# EAGLE board revised (EAGLE 8.2.1)
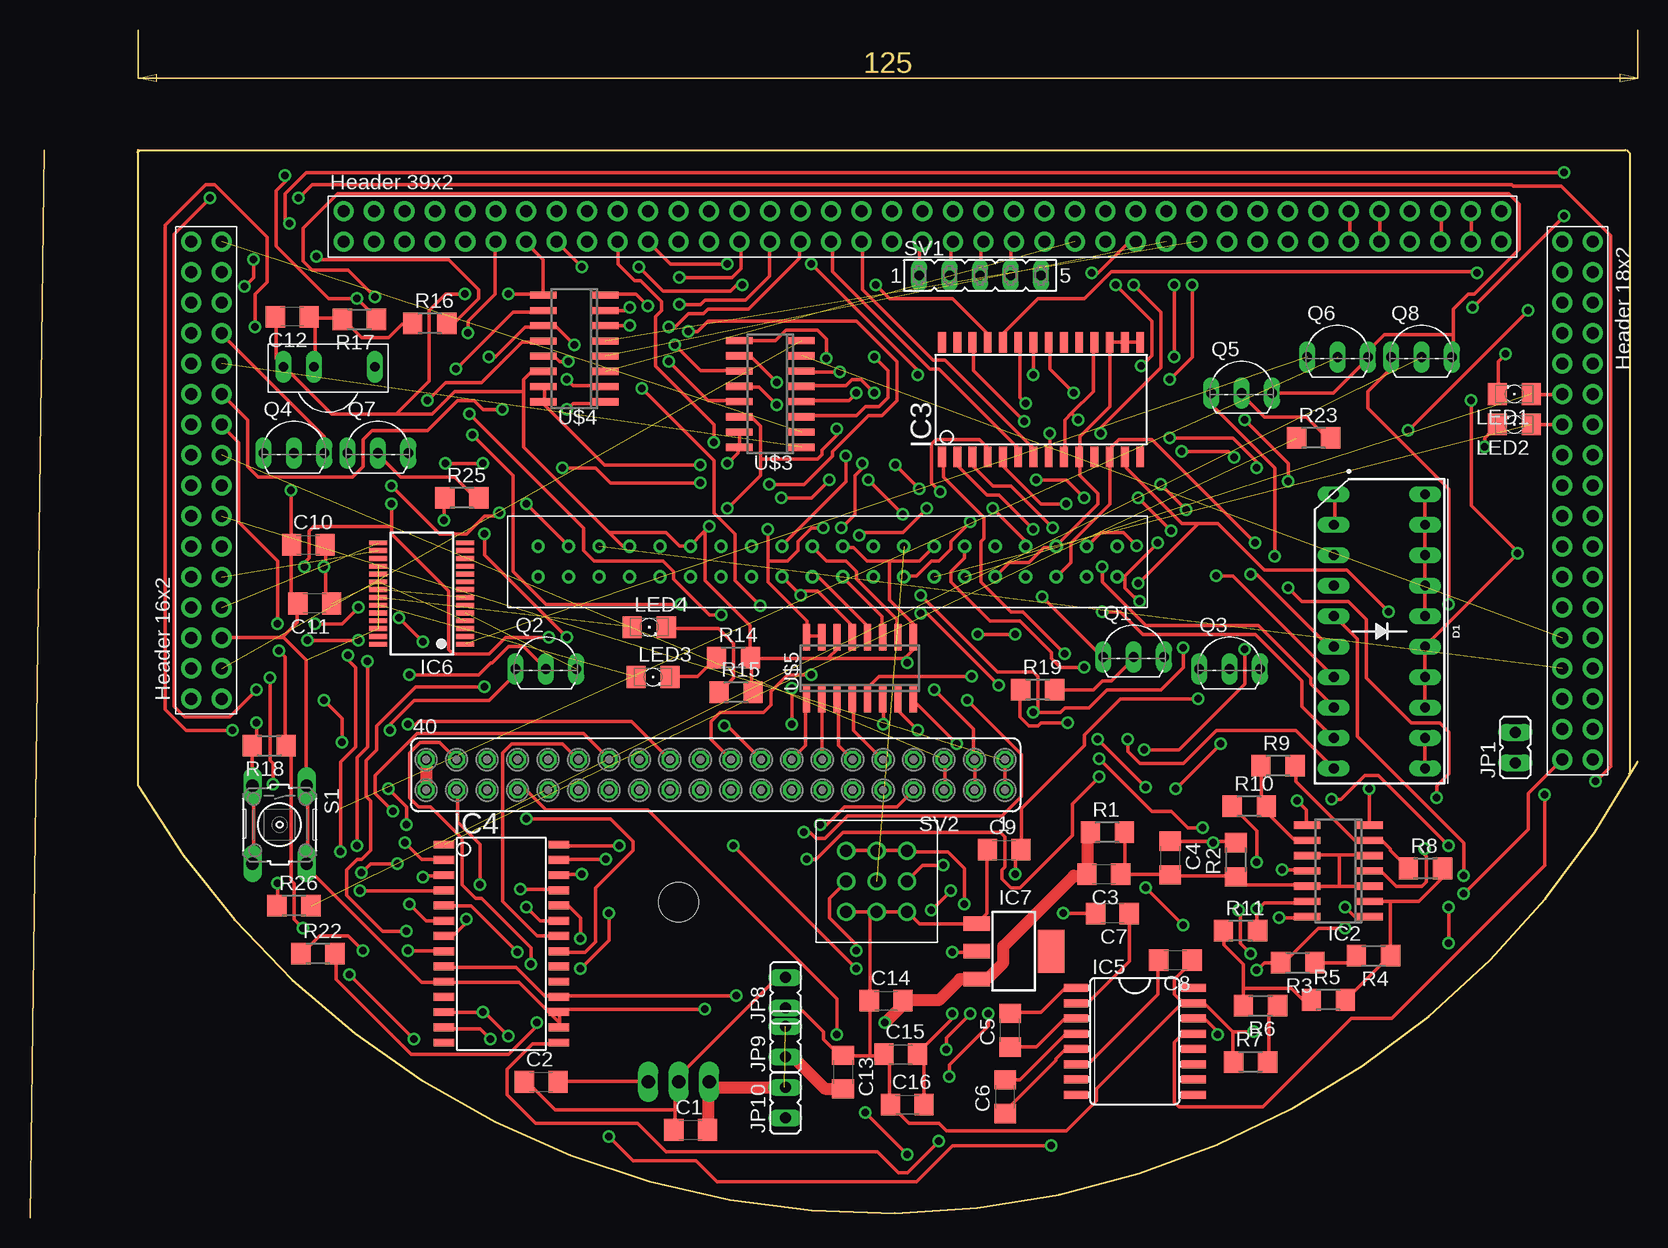
[diagram p0: board, top side]
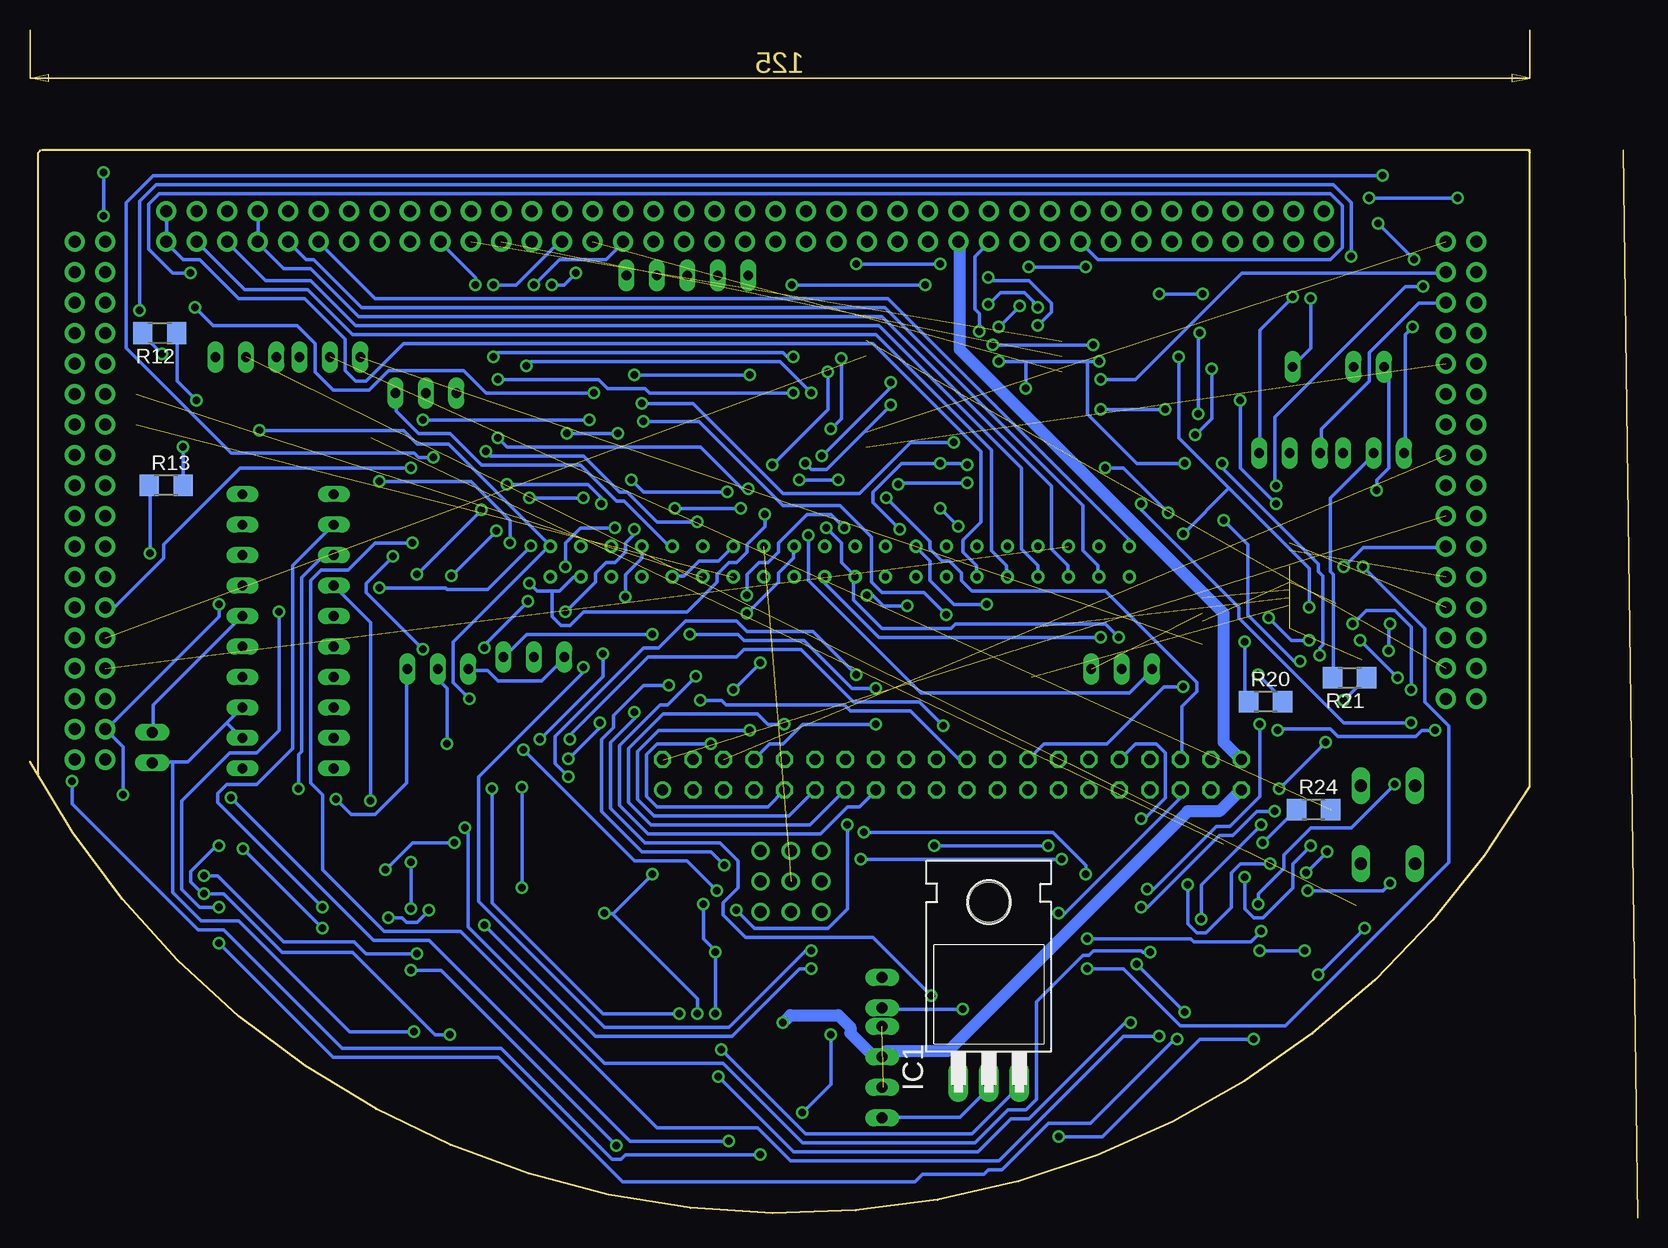
[diagram p1: board, bottom side, seen from below]

Size 125.05 x 88.63 mm. Coordinates in mm from the lower left corner, seen from the top.
Outline: 0,88.43 0.15,88.58
Outline: 124.2,88.58 124.4,88.38 124.4,36.68 124.35,36.63
Outline: 124.05,88.63 0.05,88.63 0.05,35.63 arc122 125.05,37.63
Copper layers (1*16): Top 0.035mm / dielectric 1.5mm / Bottom 0.035mm
Design rules "default": minimum track width 10mil, minimum drill 24mil, track to track 8mil, track to pad 8mil, pad to pad 8mil, via to via 8mil, smd to smd 8mil, copper to edge 40mil, drill to drill 8mil, minimum pad ring 10mil, minimum via ring 8mil, stop-mask expansion 4mil, vias tented up to drill 0mil, thermal gap 10mil
Net classes: 0 default: width 0.3 mm, clearance 0.4 mm; 1 MB29: width 1 mm, clearance 0.5 mm

## Footprints (pad centres in the part's own frame; a part is rotated, then mirrored left to right if it is on the bottom)
C1206 = smd 1.6 x 1.8: 1 -1.4,0; 2 1.4,0
LED_BARGRAPH_10 = drill 0.813 long: 1 -11.43,-3.81; 2 -8.89,-3.81; 3 -6.35,-3.81; 4 -3.81,-3.81; 5 -1.27,-3.81; 6 1.27,-3.81; 7 3.81,-3.81; 8 6.35,-3.81; 9 8.89,-3.81; 10 11.43,-3.81; 11 11.43,3.81; 12 8.89,3.81; 13 6.35,3.81; 14 3.81,3.81; 15 1.27,3.81; 16 -1.27,3.81; 17 -3.81,3.81; 18 -6.35,3.81; 19 -8.89,3.81; 20 -11.43,3.81
TO220H = drill 1.118 long: 1 -2.54,-10.16; 2 0,-10.16; 3 2.54,-10.16 | hole 3.302: 0,4.826
SO14 = smd 0.6 x 2.2: 1 -3.81,-2.6; 2 -2.54,-2.6; 3 -1.27,-2.6; 4 0,-2.6; 5 1.27,-2.6; 6 2.54,-2.6; 7 3.81,-2.6; 8 3.81,2.6; 9 2.54,2.6; 10 1.27,2.6; 11 0,2.6; 12 -1.27,2.6; 13 -2.54,2.6; 14 -3.81,2.6
SO28W = smd 0.65 x 1.7: 1 -7.62,-4.78; 2 -6.35,-4.78; 3 -5.08,-4.78; 4 -3.81,-4.78; 5 -2.54,-4.78; 6 -1.27,-4.78; 7 0,-4.78; 8 1.27,-4.78; 9 2.54,-4.78; 10 3.81,-4.78; 11 5.08,-4.78; 12 6.35,-4.78; 13 7.62,-4.78; 14 8.89,-4.78; 15 8.89,4.78; 16 7.62,4.78; 17 6.35,4.78; 18 5.08,4.78; 19 3.81,4.78; 20 2.54,4.78; 21 1.27,4.78; 22 0,4.78; 23 -1.27,4.78; 24 -2.54,4.78; 25 -3.81,4.78; 26 -5.08,4.78; 27 -6.35,4.78; 28 -7.62,4.78
SO16L = smd 0.66 x 2.032: 1 -4.445,-4.902; 2 -3.175,-4.902; 3 -1.905,-4.902; 4 -0.635,-4.902; 5 0.635,-4.902; 6 1.905,-4.902; 7 3.175,-4.902; 8 4.445,-4.902; 9 4.445,4.902; 10 3.175,4.902; 11 1.905,4.902; 12 0.635,4.902; 13 -0.635,4.902; 14 -1.905,4.902; 15 -3.175,4.902; 16 -4.445,4.902
SSOP28 = smd 0.4 x 1.5: 1 -4.225,-3.625; 2 -3.575,-3.625; 3 -2.925,-3.625; 4 -2.275,-3.625; 5 -1.625,-3.625; 6 -0.975,-3.625; 7 -0.325,-3.625; 8 0.325,-3.625; 9 0.975,-3.625; 10 1.625,-3.625; 11 2.275,-3.625; 12 2.925,-3.625; 13 3.575,-3.625; 14 4.225,-3.625; 15 4.225,3.625; 16 3.575,3.625; 17 2.925,3.625; 18 2.275,3.625; 19 1.625,3.625; 20 0.975,3.625; 21 0.325,3.625; 22 -0.325,3.625; 23 -0.975,3.625; 24 -1.625,3.625; 25 -2.275,3.625; 26 -2.925,3.625; 27 -3.575,3.625; 28 -4.225,3.625
SOT223 = smd 1.219 x 2.235: 1 -2.311,-3.099; 2 0,-3.099; 3 2.311,-3.099 | smd 3.6 x 2.2: TAB 0,3.099
JP1 = drill 0.914 long: 1 0,-1.27; 2 0,1.27
LED_1206 = smd 1.6 x 1.803: A -1.422,0; C 1.422,0
TO92-EBC = drill 0.813 long: B 0,-1.27; C -2.54,-1.27; E 2.54,-1.27
R1206 = smd 1.6 x 1.803: 1 -1.422,0; 2 1.422,0
B3F-10XX = drill 1.016 long: 1 -3.251,2.261; 2 3.251,2.261; 3 -3.251,-2.261; 4 3.251,-2.261
FE05-1 = drill 0.813 long: 1 -5.08,0; 2 -2.54,0; 3 0,0; 4 2.54,0; 5 5.08,0
FE20-2 = drill 0.914: 1 -24.13,1.27 | drill 0.914 octagon: 2 -24.13,-1.27; 3 -21.59,1.27; 4 -21.59,-1.27; 5 -19.05,1.27; 6 -19.05,-1.27; 7 -16.51,1.27; 8 -16.51,-1.27; 9 -13.97,1.27; 10 -13.97,-1.27; 11 -11.43,1.27; 12 -11.43,-1.27; 13 -8.89,1.27; 14 -8.89,-1.27; 15 -6.35,1.27; 16 -6.35,-1.27; 17 -3.81,1.27; 18 -3.81,-1.27; 19 -1.27,1.27; 20 -1.27,-1.27; 21 1.27,1.27; 22 1.27,-1.27; 23 3.81,1.27; 24 3.81,-1.27; 25 6.35,1.27; 26 6.35,-1.27; 27 8.89,1.27; 28 8.89,-1.27; 29 11.43,1.27; 30 11.43,-1.27; 31 13.97,1.27; 32 13.97,-1.27; 33 16.51,1.27; 34 16.51,-1.27; 35 19.05,1.27; 36 19.05,-1.27; 37 21.59,1.27; 38 21.59,-1.27; 39 24.13,1.27; 40 24.13,-1.27
DAUGHTERBOARD = drill 1 pad 1.676: 1 -22.86,-22.86; 1' -25.4,-22.86; 2 -22.86,-20.32; 2' -25.4,-20.32; 3 -22.86,-17.78; 3' -25.4,-17.78; 4 -22.86,-15.24; 4' -25.4,-15.24; 5 -22.86,-12.7; 5' -25.4,-12.7; 6 -22.86,-10.16; 6' -25.4,-10.16; 7 -22.86,-7.62; 7A -25.4,-7.62; 8 -22.86,-5.08; 8A -25.4,-5.08; 9 -22.86,-2.54; 9A -25.4,-2.54; 10 -22.86,0; 10A -25.4,0; 11 -22.86,2.54; 11' -25.4,2.54; 12 -22.86,5.08; 12' -25.4,5.08; 13 -22.86,7.62; 13' -25.4,7.62; 14 -22.86,10.16; 14' -25.4,10.16; 15 -22.86,12.7; 15' -25.4,12.7; 16 -22.86,15.24; 16' -25.4,15.24; 17A -12.7,17.78; 17B -12.7,15.24; 18 -10.16,15.24; 18' -10.16,17.78; 19 -7.62,15.24; 19' -7.62,17.78; 20 -5.08,15.24; 20A -5.08,17.78; 21 -2.54,15.24; 21A -2.54,17.78; 22 0,15.24; 22' 0,17.78; 23 2.54,15.24; 23' 2.54,17.78; 24 5.08,15.24; 24' 5.08,17.78; 25 7.62,15.24; 25' 7.62,17.78; 26 10.16,15.24; 26' 10.16,17.78; 27 12.7,15.24; 27' 12.7,17.78; 28 15.24,15.24; 28' 15.24,17.78; 29 17.78,15.24; 29' 17.78,17.78; 30 20.32,15.24; 30' 20.32,17.78; 31 22.86,15.24; 31' 22.86,17.78; 32 25.4,15.24; 32' 25.4,17.78; 33 27.94,15.24; 33' 27.94,17.78; 34 30.48,15.24; 34' 30.48,17.78; 35 33.02,15.24; 35A 33.02,17.78; 36 35.56,15.24; 36' 35.56,17.78; 37 38.1,15.24; 37' 38.1,17.78; 38 40.64,15.24; 38' 40.64,17.78; 39 43.18,15.24; 39' 43.18,17.78; 40 45.72,15.24; 40' 45.72,17.78; 41 48.26,15.24; 41' 48.26,17.78; 42 50.8,15.24; 42' 50.8,17.78; 43 53.34,15.24; 43' 53.34,17.78; 44 55.88,15.24; 44' 55.88,17.78; 45 58.42,15.24; 45' 58.42,17.78; 46 60.96,15.24; 46' 60.96,17.78; 47 63.5,15.24; 47' 63.5,17.78; 48 66.04,15.24; 48' 66.04,17.78; 49 68.58,15.24; 49' 68.58,17.78; 50 71.12,15.24; 50' 71.12,17.78; 51 73.66,15.24; 51' 73.66,17.78; 52 76.2,15.24; 52' 76.2,17.78; 53 78.74,15.24; 53' 78.74,17.78; 54 81.28,15.24; 54' 81.28,17.78; 55 83.82,15.24; 55' 83.82,17.78; 57 88.9,15.24; 57A 91.44,15.24; 58 88.9,12.7; 58A 91.44,12.7; 59 88.9,10.16; 59A 91.44,10.16; 60 88.9,7.62; 60A 91.44,7.62; 61 88.9,5.08; 61' 91.44,5.08; 62 88.9,2.54; 62' 91.44,2.54; 63 88.9,0; 63' 91.44,0; 64 88.9,-2.54; 64' 91.44,-2.54; 65 88.9,-5.08; 65' 91.44,-5.08; 66 88.9,-7.62; 66' 91.44,-7.62; 67 88.9,-10.16; 67' 91.44,-10.16; 68 88.9,-12.7; 68' 91.44,-12.7; 69 88.9,-15.24; 69' 91.44,-15.24; 70 88.9,-17.78; 70' 91.44,-17.78; 71 88.9,-20.32; 71' 91.44,-20.32; 72 88.9,-22.86; 72' 91.44,-22.86; 73 88.9,-25.4; 73' 91.44,-25.4; 74 88.9,-27.94; 74' 91.44,-27.94
MALE_HEADER_PACKAGE = drill 0.6: 1 -35.56,12.7; 2 -35.56,15.24; 3 -33.02,12.7; 4 -33.02,15.24; 5 -30.48,12.7; 6 -30.48,15.24; 7 -27.94,12.7; 8 -27.94,15.24; 9 -25.4,12.7; 10 -25.4,15.24; 11 -22.86,12.7; 12 -22.86,15.24; 13 -20.32,12.7; 14 -20.32,15.24; 15 -17.78,12.7; 16 -17.78,15.24; 17 -15.24,12.7; 18 -15.24,15.24; 19 -12.7,12.7; 20 -12.7,15.24; 21 -10.16,12.7; 22 -10.16,15.24; 23 -7.62,12.7; 24 -7.62,15.24; 25 -5.08,12.7; 26 -5.08,15.24; 27 -2.54,12.7; 28 -2.54,15.24; 29 0,12.7; 30 0,15.24; 31 2.54,12.7; 32 2.54,15.24; 33 5.08,12.7; 34 5.08,15.24; 35 7.62,12.7; 36 7.62,15.24; 37 10.16,12.7; 38 10.16,15.24; 39 12.7,12.7; 40 12.7,15.24
SO16 = smd 0.6 x 2.2: 1 -4.445,-2.6; 2 -3.175,-2.6; 3 -1.905,-2.6; 4 -0.635,-2.6; 5 0.635,-2.6; 6 1.905,-2.6; 7 3.175,-2.6; 8 4.445,-2.6; 9 4.445,2.6; 10 3.175,2.6; 11 1.905,2.6; 12 0.635,2.6; 13 -0.635,2.6; 14 -1.905,2.6; 15 -3.175,2.6; 16 -4.445,2.6
TSOP17XX = drill 0.813 long: GND -3.81,0; OUT 3.81,0; V+ -1.27,0
SERVO = drill 1: 1 -20.32,5.08; 1" -15.24,5.08; 1' -17.78,5.08; 2 -20.32,2.54; 2" -15.24,2.54; 2' -17.78,2.54; 3 -20.32,0; 3" -15.24,0; 3' -17.78,0

## Placement (x,y rotation side)
C1  100uf  [C1206]  46.12,6.94 0 top
C2  10uf  [C1206]  33.66,10.94 0 top
C3  .1uf  [C1206]  80.56,28.25 180 top
C4  .1uf  [C1206]  86.08,29.6 270 top
C5  .1uf  [C1206]  72.75,15.24 90 top
C6  .1uf  [C1206]  72.34,9.7 90 top
C7  .1uf  [C1206]  81.28,24.97 180 top
C8  .1uf  [C1206]  86.53,21.08 180 top
C9  .1uf  [C1206]  72.25,30.29 0 top
C10  .1uf  [C1206]  14.25,55.71 0 top
C11  100uf  [C1206]  14.79,50.82 180 top
C12  10uf  [C1206]  12.91,74.71 180 top
C13  10uf  [C1206]  58.82,11.75 270 top
C14  100uf  [C1206]  62.41,17.71 0 top
C15  10uf  [C1206]  63.63,13.24 0 top
C16  .1uf  [C1206]  64.17,9.05 0 top
D1  BLUE  [LED_BARGRAPH_10]  103.54,48.5 270 top
IC1  7805T  [TO220H]  45.12,21.1 0 bottom
IC2  LMV324M  [SO14]  100.11,28.53 90 top
IC3  MCP23017SO  [SO28W]  74.7,67.82 0 top
IC4  MCP23017SO  [SO28W]  30.34,23.1 270 top
IC5  MAX202ECWE  [SO16L]  83.14,14.32 270 top
IC6  FT232RL  [SSOP28]  23.71,51.65 90 top
IC7  LM1117IMPX-3.3  [SOT223]  73.06,21.83 270 top
JP1  [JP1]  114.86,38.8 0 top
JP8  [JP1]  54.01,18.37 0 top
JP9  [JP1]  54.01,14.29 0 top
JP10  [JP1]  54.01,9.21 0 top
LED1  [LED_1206]  114.78,68.28 180 top
LED2  [LED_1206]  114.78,65.74 180 top
LED3  [LED_1206]  42.99,44.69 0 top
LED4  [LED_1206]  42.67,48.85 0 top
Q1  BC548  [TO92-EBC]  83.05,47.63 0 top
Q2  BC548  [TO92-EBC]  34.05,46.63 0 top
Q3  BC548  [TO92-EBC]  91.05,46.63 0 top
Q4  BC548  [TO92-EBC]  13.05,64.63 0 top
Q5  BC548  [TO92-EBC]  92.05,69.63 0 top
Q6  BC548  [TO92-EBC]  100.05,72.63 0 top
Q7  BC548  [TO92-EBC]  20.05,64.63 0 top
Q8  BC548  [TO92-EBC]  107.05,72.63 0 top
R1  10k  [R1206]  80.86,31.75 0 top
R2  3.3k  [R1206]  91.57,29.46 90 top
R3  10k  [R1206]  96.72,20.88 180 top
R4  10k  [R1206]  103.04,21.45 180 top
R5  10k  [R1206]  99.28,17.78 0 top
R6  10k  [R1206]  93.62,17.29 180 top
R7  10k  [R1206]  92.8,12.6 0 top
R8  10k  [R1206]  107.38,28.73 0 top
R9  10k  [R1206]  95.08,37.29 0 top
R10  10k  [R1206]  92.68,33.91 0 top
R11  10k  [R1206]  91.96,23.54 0 top
R12  220ohm  [R1206]  114.24,73.36 180 bottom
R13  220ohm  [R1206]  113.7,60.66 0 bottom
R14  270ohm  [R1206]  49.69,46.31 0 top
R15  270ohm  [R1206]  49.91,43.42 0 top
R16  100e  [R1206]  24.37,74.17 0 top
R17  10k  [R1206]  18.51,74.52 180 top
R18  10k  [R1206]  10.99,38.97 180 top
R19  1k  [R1206]  75.05,43.63 0 top
R20  1k  [R1206]  22.05,42.63 0 bottom
R21  1k  [R1206]  15.05,44.63 180 bottom
R22  1k  [R1206]  15.05,21.63 0 top
R23  1k  [R1206]  98.05,64.63 0 top
R24  1k  [R1206]  18.05,33.63 0 bottom
R25  1k  [R1206]  27.05,59.63 0 top
R26  1k  [R1206]  13.05,25.63 0 top
S1  [B3F-10XX]  11.86,32.38 270 top
SV1  [FE05-1]  70.25,78.17 0 top
SV2  [FE20-2]  48.2,36.53 180 top
U$1  DAUGHTERBOARDDAUGHTERBOARD  [DAUGHTERBOARD]  29.88,65.74 0 top
U$2  MALE_HEADER  [MALE_HEADER_PACKAGE]  46.11,68.28 180 top
U$3  MCP3008SL  [SO16]  52.76,68.29 90 top
U$4  MCP3008SL  [SO16]  36.43,72.07 90 top
U$5  MCP3008SL  [SO16]  60.23,45.42 0 top
U$6  TSOP1738  [TSOP17XX]  15.99,70.55 0 top
U$7  SERVO  [SERVO]  79.41,25.1 0 top

## Library data of the parts
C1-C16 = eagle-ltspice; SPICEMODEL: NONE; SPICEPREFIX: C
D1 = SparkFun-LED; PROD_ID: DIO-10613
IC1 = linear2
IC2 = linear
IC3 IC4 = microchip-update-2
IC5 = maxim; MPN: MAX202ECWE+T; OC_FARNELL: 9724419; OC_NEWARK: 67K4364
IC6 = ftdichip; MPN: FT232RL; OC_FARNELL: 1146032; OC_NEWARK: 91K9918
IC7 = lm1117
JP1 JP8-JP10 = jumper
LED1-LED4 = eagle-ltspice; SPICEMODEL: NONE; SPICEPREFIX: D; SPICETYPE: diode
Q1-Q8 = transistor-npn
R1-R26 = eagle-ltspice; SPICEMODEL: NONE; SPICEPREFIX: R
S1 = switch-omron; MPN: B3F-1000; OC_FARNELL: 176432; OC_NEWARK: 36M3542
SV1 SV2 = con-lsta; OC_FARNELL: unknown; OC_NEWARK: unknown
U$1 = Daughterboard
U$2 = male_header_device
U$3-U$5 = MCP3008
U$6 = tsop
U$7 = switch

## Nets
A: D1.16 D1.17 D1.18 D1.19 D1.20 JP1.2
ABC: U$2.40
ADC1: SV2.9 U$5.8
ADC2: SV2.11 U$5.7
ADC3: SV2.13 U$5.6
ADC4: SV2.15 U$5.5
ADC5: SV2.10 U$5.4
ADC6: SV2.12 U$5.3
ADC7: SV2.14 U$5.2
ADC8: SV2.16 U$5.1
BAR1: D1.6 IC3.5
BAR2: D1.7 IC3.4
BAR3: D1.8 IC3.3
BAR4: D1.9 IC3.2
BAR5: D1.10 IC3.1
BUZZER: U$1.71 U$2.35
CS0: U$2.23 U$3.10
CS1: U$2.25 U$4.10
CS2: U$2.21 U$5.10
D4: IC3.23 U$1.26
D5: IC3.24 U$1.25
D6: IC3.22 U$1.27
D7: IC3.21 U$1.28
EEPROM: U$2.27
EEPROM1: U$2.28
EL: LED1.A U$1.62 U$2.12
EN: IC3.25 U$1.24
ER: LED2.A U$1.63 U$2.14
GND: C8.1 C9.1 C10.1 C11.2 C12.2 C13.1 C14.1 C15.1 C16.1 D1.11 D1.12 D1.13 D1.14 D1.15 IC3.10 IC3.15 IC3.16 IC3.17 IC4.10 IC4.16 IC4.17 IC5.15 IC6.7 IC6.18 IC6.21 IC6.25 IC6.26 IC7.1 JP1.1 JP8.1 R7.1 R12.1 R13.1 R14.2 R15.2 S1.1 S1.2 SV2.3 SV2.4 U$1.3 U$1.23 U$2.5 U$2.10 U$2.13 U$2.19 U$2.29 U$2.33 U$3.9 U$3.14 U$4.9 U$4.14 U$5.9 U$5.14 U$6.GND U$7.3 U$7.3" U$7.3'
GND1: C4.1 IC2.11 R2.2
GPA0: IC4.21 SV2.32
GPA1: IC4.22 SV2.30
GPA2: IC4.23 SV2.28
GPA3: IC4.24 SV2.26
GPA4: IC4.25 SV2.24
GPA5: IC4.26 SV2.22
GPA6: IC4.27 SV2.20
GPA7: IC4.28 SV2.18
INTSWITCH: R18.2 S1.3 S1.4 U$2.37
IR1: U$1.12 U$3.1
IR2: U$1.16 U$3.2
IR3: U$1.42 U$3.3
IR4: U$1.43 U$3.4
IR5: U$1.46 U$3.5
IR6: U$1.69 U$3.6
IR7: U$1.70 U$3.7
IR8: U$1.2 U$3.8
L1: U$1.51 U$1.51' U$2.38
L2: U$1.52 U$1.52' U$2.36
MB4: IC6.15 U$1.4
MB5: IC6.16 U$1.5
MB6: C10.2 C11.1 IC6.4 IC6.20 U$1.6
MB7: SV2.1 SV2.2 U$1.7
MB9: SV2.5 SV2.6 U$1.9
MB10: IC2.4 R3.2 R18.1 U$1.10
MB29 [MB29]: C3.2 C13.2 C14.2 IC7.3 JP9.1 R1.1 SV2.39 SV2.40 U$1.29
MB33: IC3.6 U$1.33
MB34: IC3.7 U$1.34
MB40: IC3.8 U$1.40
MISO: SV2.35 U$2.22 U$3.12 U$4.12 U$5.12
MOSI: SV2.33 U$2.20 U$3.11 U$4.11 U$5.11
N$1: C1.1 C2.1 IC1.2 JP8.2 JP10.1
N$2: R5.1 R6.2 R11.1
N$3: C3.1 C4.2 IC2.3 IC2.5 IC2.10 IC2.12 R1.2 R2.1
N$4: R3.1 R4.2
N$5: IC2.2 R4.1 R5.2 R8.2
N$6: IC2.6 R8.1 R9.2
N$7: R6.1 R7.2
N$8: IC2.9 R9.1 R10.2
N$9: IC2.13 R10.1 R11.2
N$10: D1.1 D1.2 IC2.1
N$11: C5.1 IC5.3
N$12: D1.4 IC2.8
N$13: D1.5 IC2.14
N$14: LED1.C R12.2
N$15: LED2.C R13.2
N$16: Q1.B R19.2
N$17: Q2.B R20.2
N$18: C5.2 IC5.1
N$19: C6.2 IC5.4
N$20: IC3.20
N$21: IC3.19
N$22: C6.1 IC5.5
N$23: LED4.C R15.1
N$24: D1.3 IC2.7
N$25: LED3.C R14.1
N$26: IC6.23 LED3.A
N$27: IC6.22 LED4.A
N$28: C7.1 IC5.2
N$29: C8.2 IC5.6
N$30: Q4.B R21.2
N$31: Q3.B R22.2
N$32: C12.1 R16.1 R17.2 U$6.V+
N$33: IC3.27
N$38: Q8.B R26.2
N$39: Q7.B R25.2
N$40: Q6.B R24.2
N$41: Q5.B R23.2
NS50 [MB29]: C1.2 IC1.1 JP9.2 JP10.2
PI1: IC3.9 IC3.18 IC4.9 IC4.18 U$2.2 U$3.15 U$3.16 U$4.15 U$4.16 U$5.15 U$5.16
PI2: C2.2 C7.2 C9.2 IC1.3 R16.2 U$2.1
PI3: IC3.13 IC4.13 SV2.36 U$2.4
PI4: IC4.15 U$2.3
PI5: IC3.12 IC4.12 SV2.38 U$2.6
PI8: Q1.C Q2.C Q3.C Q4.C U$2.7
PI10: Q5.E Q6.E Q7.E Q8.E U$2.9
PI22: R17.1 U$2.16 U$6.OUT
PWML: U$1.50 U$1.50' U$2.39
PWMR: U$1.54 U$1.54' U$2.32
R1: U$1.53 U$1.53' U$2.34
R1OUT: IC5.12
R2: U$1.55 U$1.55' U$2.30
RS: IC3.26 U$1.22
RX_FT_EN: IC4.6 R20.1
RX_P_EN: IC4.5 R19.1
RX_RS_EN: IC4.8 R22.1
RX_XB_EN: IC4.7 R21.1
RXFT: IC6.5 Q2.E
RXP: Q1.E SV2.8
RXRS: IC5.14 Q3.E U$1.74
RXXB: Q4.E U$1.13
SERVO: C15.2 C16.2 IC7.2 U$7.1 U$7.1" U$7.1'
SERVO1: U$2.11 U$7.2
SERVO2: U$2.15 U$7.2'
SERVO3: U$2.17 U$7.2"
SH1: U$1.11 U$4.1
SH2: U$1.15 U$4.2
SH3: U$1.41 U$4.3
SH4: U$1.44 U$4.4
SH5: U$1.45 U$4.5
SPICLK: SV2.37 U$2.24 U$3.13 U$4.13 U$5.13
T1IN: IC5.11
TX_FT_EN: IC4.2 R24.1
TX_P_EN: IC4.1 R23.1
TX_RS_EN: IC4.4 R26.1
TX_XB_EN: IC4.3 R25.1
TXFT: IC6.1 Q6.C
TXP: Q5.C SV2.7
TXRS: IC5.13 Q8.C U$1.73
TXXB: Q7.C U$1.14
VCC: IC5.16
WL1: U$1.30 U$4.6
WL2: U$1.31 U$4.7
WL3: U$1.32 U$4.8
WL4: SV1.1 U$1.36
WL5: SV1.2 U$1.37
WL6: SV1.3 U$1.38
WL7: SV1.4 U$1.39

## Tracks (layer width: path | path; a pad name or v marks a point on that pad's centre or on a via)
A
  Top 0.3: D1.20 107.3,59.88 107.3,57.51 D1.19 107.3,57.26 107.3,54.88 D1.18 107.3,54.76 107.3,52.38 D1.17 107.3,52.26 107.3,49.88 D1.16
  Bottom 0.3: JP1.2 114.8,40.13 114.8,42.38 107.43,49.76 D1.16
ADC1  (via drill 0.61)
  Top 0.3: v68.3,39.13 64.68,42.76 U$5.8
  Bottom 0.3: v68.3,39.13 72.8,39.13 73.68,38.26 73.68,34.76 72.8,33.88 63.55,33.88 SV2.9
ADC2  (via drill 0.61)
  Top 0.3: v65.05,40.26 63.43,41.88 63.43,42.76 U$5.7
  Bottom 0.3: v65.05,40.26 72.68,40.26 74.43,38.51 74.43,34.51 73.05,33.13 61.8,33.13 59.68,35.26 SV2.11
ADC3  (via drill 0.61)
  Top 0.3: v62.18,40.76 62.18,42.76 U$5.6
  Bottom 0.3: v62.18,40.76 63.55,40.76 64.43,41.63 72.3,41.63 75.18,38.76 75.18,34.26 73.3,32.38 60.05,32.38 57.18,35.26 SV2.13
ADC4  (via drill 0.61)
  Top 0.3: v69.55,44.76 61.8,44.76 60.93,43.88 60.93,42.88 U$5.5
  Bottom 0.3: v69.55,44.76 71.93,42.38 72.55,42.38 75.93,39.01 75.93,34.01 73.55,31.63 59.18,31.63 56.93,33.88 55.93,33.88 SV2.15
ADC5
  Top 0.3: U$5.4 59.68,42.76 59.68,40.26 62.05,37.88 SV2.10
ADC6
  Top 0.3: SV2.12 58.43,39.01 58.43,42.76 U$5.3
ADC7
  Top 0.3: U$5.2 57.05,42.76 57.05,37.88 SV2.14
ADC8
  Top 0.3: U$5.1 55.68,42.76 55.68,39.01 54.55,37.88 SV2.16
BAR1  (via drill 0.61)
  Top 0.3: v77.43,59.13 75.3,59.13 72.18,62.26 72.18,63.01 IC3.5 | v87.43,58.63 v85.3,60.76 | v92.8,53.26 93.3,53.26 99.3,47.26 99.68,47.26 D1.6
  Bottom 0.3: v77.43,59.13 77.43,59.63 78.55,60.76 v85.3,60.76 | v92.8,53.26 v87.43,58.63
BAR2  (via drill 0.61)
  Top 0.3: v66.93,60.13 66.18,60.88 66.18,64.13 66.55,64.51 70.18,64.51 70.8,63.88 70.8,63.13 IC3.4 | v74.93,61.13 77.43,61.13 v78.93,59.63 | v86.18,56.88 v83.43,59.63 | v89.93,53.13 91.3,53.13 99.68,44.76 D1.7
  Bottom 0.3: v66.93,60.13 73.93,60.13 v74.93,61.13 | v83.43,59.63 v78.93,59.63 | v89.93,53.13 v86.18,56.88
BAR3  (via drill 0.61)
  Top 0.3: v76.3,57.13 72.8,60.63 71.3,60.63 69.68,62.26 69.68,63.01 IC3.3 | v80.43,53.88 80.43,52.63 84.05,49.01 93.43,49.01 97.8,44.63 97.8,44.13 99.68,42.26 D1.8
  Bottom 0.3: v76.3,57.13 79.18,57.13 80.43,55.88 v80.43,53.88
BAR4  (via drill 0.61)
  Top 0.3: v74.68,57.01 71.8,59.88 70.8,59.88 68.43,62.26 68.43,63.01 IC3.2 | v80.43,50.13 81.93,50.13 83.8,48.26 93.18,48.26 97.05,44.38 97.05,42.26 99.68,39.63 D1.9
  Bottom 0.3: v74.68,57.01 74.68,56.63 75.43,55.88 75.43,55.13 76.3,54.26 77.05,54.26 77.93,53.38 77.93,52.63 v80.43,50.13
BAR5  (via drill 0.61)
  Top 0.3: v77.3,46.63 73.8,50.13 72.8,50.13 70.3,52.63 70.3,56.01 70.55,56.26 70.55,58.01 67.18,61.38 67.18,63.01 IC3.1 | v82.55,39.51 82.55,38.51 83.55,37.51 87.18,37.51 89.93,40.26 96.55,40.26 99.68,37.13 D1.10
  Bottom 0.3: v77.3,46.63 77.3,44.76 v82.55,39.51
BUZZER  (1 unrouted)
CS0  (via drill 0.61)
  Top 0.3: v53.3,69.26 51.18,71.38 50.18,71.38 U$3.10 | v59.05,63.13 59.05,61.01 53.68,55.63 U$2.23
  Bottom 0.3: v53.3,69.26 53.3,68.88 v59.05,63.13
CS1  (via drill 0.61)
  Top 0.3: v26.55,70.38 31.3,75.13 33.8,75.13 U$4.10 | v27.93,64.88 31.3,61.51 31.3,53.51 34.05,50.76 v45.3,50.76
  Bottom 0.3: v26.55,70.38 26.55,66.26 v27.93,64.88 | v45.3,50.76 48.05,50.76 50.05,52.76 50.05,54.38 51.18,55.51 U$2.25
CS2
  Top 0.3: U$5.10 63.3,48.13 63.3,49.51 59.93,52.88 59.93,53.51 59.05,54.38 57.43,54.38 56.3,55.51 U$2.21
D4  (via drill 0.61)
  Top 0.3: v74.05,67.51 73.55,68.01 73.55,72.51 IC3.23 | v48.05,64.26 48.05,65.76 43.18,70.63 43.18,74.76 43.68,75.26 43.68,76.01 41.93,77.76 41.43,77.76 40.05,79.13 40.05,80.88 U$1.26
  Bottom 0.3: v74.05,67.51 69.8,67.51 62.3,60.01 55.93,60.01 51.68,64.26 v48.05,64.26
D5  (via drill 0.61)
  Top 0.3: v111.68,78.38 111.55,78.51 81.18,78.51 78.93,76.26 75.05,76.26 72.18,73.38 72.18,72.63 IC3.24
  Bottom 0.3: v111.68,78.38 113.18,78.38 115.18,80.38 115.18,84.13 114.3,85.01 16.68,85.01 15.68,84.01 15.68,80.51 16.68,79.51 36.05,79.51 37.43,80.88 U$1.25
D6  (via drill 0.61)
  Top 0.3: v74.68,69.88 74.68,72.51 IC3.22 | v65.05,69.88 65.05,70.26 v56.18,79.13 | v49.18,79.13 44.43,79.13 42.68,80.88 U$1.27
  Bottom 0.3: v65.05,69.88 v74.68,69.88 | v49.18,79.13 v56.18,79.13
D7  (via drill 0.61)
  Top 0.3: v78.05,68.38 76.05,70.38 76.05,72.51 IC3.21 | v118.93,83.13 v111.3,75.51 | v118.93,86.76 14.05,86.76 12.3,85.01 12.3,82.88 v12.68,82.51 | v9.68,79.51 9.68,78.01 v8.93,77.26 | v21.18,60.63 25.18,56.63 27.43,56.63 28.93,58.13 29.93,58.13 v30.18,58.38 | v35.43,62.13 38.18,62.13 39.43,60.88 v46.93,60.88 | v52.68,60.76 55.55,60.76 57.93,63.13 57.93,63.51 60.93,66.51 62.05,66.51 63.3,67.76 63.3,71.01 59.93,74.38 47.55,74.38 46.68,73.51 v45.93,73.51
  Bottom 0.3: v78.05,68.38 87.05,68.38 88.93,70.26 95.18,70.26 96.8,68.63 99.8,68.63 101.3,70.13 101.3,72.51 102.8,74.01 109.8,74.01 v111.3,75.51 | v118.93,86.76 v118.93,83.13 | v9.68,79.51 v12.68,82.51 | v8.93,77.26 10.43,77.26 21.3,66.38 21.3,60.76 v21.18,60.63 | v30.18,58.38 33.93,62.13 v35.43,62.13 | v46.93,60.88 52.55,60.88 v52.68,60.76 | v45.93,73.51 45.93,75.01 46.3,75.38 46.3,79.76 45.18,80.88 U$1.28
EL  (1 unrouted)
  Top 0.3: LED1.A 116.3,68.26 118.68,68.26 U$1.62
EN  (via drill 0.61)
  Top 0.3: v61.55,77.38 62.68,76.26 67.93,76.26 70.8,73.38 70.8,72.63 IC3.25 | v50.43,77.38 49.93,77.38 49.43,76.88 43.8,76.88 v41.8,78.88 | v37.05,78.88 35.05,80.88 U$1.24
  Bottom 0.3: v50.43,77.38 v61.55,77.38 | v37.05,78.88 v41.8,78.88
ER  (1 unrouted)
  Top 0.3: LED2.A 116.3,65.76 118.68,65.76 U$1.63
GND  (via drill 0.61)  (5 unrouted)
  Top 0.3: D1.11 107.3,37.13 107.3,39.51 D1.12 | D1.13 107.3,42.26 107.3,44.63 D1.14 107.3,44.76 107.3,47.13 D1.15 107.3,47.26 v115.05,55.01 115.05,55.13 111.18,59.01 v111.18,67.76 | C9.1 70.8,30.26 70.8,25.01 70.05,24.26 IC7.1 69.93,24.13 65.18,24.13 64.3,25.01 U$7.3" 64.05,25.13 61.68,25.13 U$7.3' | U$7.3 59.18,25.13 61.55,25.13 U$7.3' | C8.1 87.93,21.01 86.43,19.51 86.43,18.26 87.18,17.51 87.93,17.51 IC5.15 | 91.3,15.13 91.3,12.63 R7.1 | 91.3,15.13 88.93,17.51 88.18,17.51 IC5.15 | 61.05,13.13 62.18,13.13 C15.1 62.18,13.01 62.68,12.51 62.68,9.13 C16.1 62.8,9.01 64.3,7.51 66.8,7.51 67.43,6.88 77.43,6.88 79.93,9.38 79.93,10.38 87.05,17.51 IC5.15 | 61.05,13.13 58.93,13.13 C13.1 58.68,13.13 58.55,13.13 57.18,14.51 57.18,15.13 55.3,17.01 54.05,17.01 JP8.1 | 61.05,13.13 61.05,17.63 C14.1 61.05,17.76 61.05,25.01 U$7.3' | 91.3,15.13 v93.05,15.13 | SV2.3 69.8,35.38 69.8,37.76 SV2.4 69.68,37.88 69.68,40.38 v66.43,43.63 | R14.2 51.18,46.26 51.18,43.63 51.3,43.51 R15.2 | 57.61,46.32 57.55,46.26 51.3,46.26 R14.2 | 57.61,46.32 58.3,47.01 58.3,48.01 U$5.14 | 63.93,46.26 64.68,47.01 U$5.9 64.68,49.13 62.68,51.13 62.68,54.38 | 63.93,46.26 57.68,46.26 57.61,46.32 | v64.18,45.88 63.93,46.13 63.93,46.26 | IC3.15 83.55,72.63 82.43,72.63 IC3.16 82.3,72.63 81.18,72.63 IC3.17 81.05,67.26 78.55,64.76 78.55,63.13 IC3.10 78.55,63.01 78.55,61.51 80.05,60.01 80.05,59.13 76.55,55.63 U$2.5 76.55,55.51 75.55,55.51 74.3,54.26 72.68,54.26 71.55,53.13 U$2.10 | 62.68,54.38 65.18,54.38 66.43,55.63 U$2.13 | 62.68,54.38 60.8,54.38 59.68,55.51 58.93,55.51 U$2.19 | 35.18,16.01 35.18,16.63 IC4.17
  Top 0.3: 35.18,16.01 35.18,15.51 IC4.16 | 34.11,16.95 35.05,16.01 35.18,16.01 | 34.11,16.95 31.8,19.26 25.68,19.26 IC4.10 25.43,19.26 23.68,19.26 14.18,28.76 14.18,29.01 S1.2 14.18,29.13 14.18,35.63 S1.1 14.05,35.76 14.05,46.13 12.18,48.01 12.05,48.01 | 12.05,48.01 7.05,48.01 U$1.3 | 12.05,48.01 13.3,49.26 13.3,50.76 C11.2 13.3,50.88 12.8,51.38 12.8,55.63 C10.1 12.8,55.76 v12.8,60.26 | 51.93,62.88 51.93,61.51 v49.18,58.76 | 51.93,62.88 51.93,65.63 51.18,66.38 50.18,66.38 U$3.14 | 47.24,56.82 46.05,55.63 U$2.29 45.93,55.63 45.18,55.63 44.05,56.76 39.43,56.76 39.36,56.7 | 47.24,56.82 v47.68,57.26 | v57.43,71.26 57.43,72.88 56.68,73.63 54.05,73.63 53.18,72.76 50.18,72.76 U$3.9 | v58.3,65.38 58.3,64.88 57.05,63.63 57.05,63.26 56.68,62.88 51.93,62.88 | U$1.23 32.43,80.88 33.8,79.51 33.8,76.63 U$4.9 33.68,76.63 v30.93,76.63 | C12.2 11.55,74.63 11.55,71.26 12.18,70.63 U$6.GND 12.3,70.51 16.18,66.63 21.68,66.63 | 32.18,68.51 32.18,63.88 39.36,56.7 | 32.18,68.51 32.18,69.51 32.8,70.13 33.8,70.13 U$4.14 | 39.36,56.7 40.43,55.63 40.93,55.63 U$2.33 | 21.68,66.63 24.55,66.63 26.43,68.51 32.18,68.51 | v27.3,76.63 25.68,76.63 24.3,75.26 24.3,69.38 21.68,66.76 21.68,66.63 | R14.2 51.05,46.38 51.05,49.01 47.3,52.76 47.3,56.76 47.24,56.82 | v47.3,17.01 34.18,17.01 34.11,16.95
  Bottom 0.3: 113.18,37.63 111.93,37.63 108.68,40.88 | 113.18,37.63 114.8,37.63 JP1.1 | 108.68,40.88 107.43,42.13 D1.13 | 108.68,40.88 107.43,39.63 D1.12 | v115.05,55.01 115.05,60.63 R13.1 | v111.18,67.76 112.8,69.38 112.8,73.26 R12.1 | 113.18,37.63 113.18,26.76 110.8,24.38 107.68,24.38 98.43,15.13 v93.05,15.13 | v64.18,45.88 v66.43,43.63 | U$2.10 71.43,53.13 70.55,53.13 69.3,54.38 67.68,54.38 66.55,55.51 U$2.13 | v47.68,57.26 v49.18,58.76 | v57.43,71.26 57.43,66.26 v58.3,65.38 | v27.3,76.63 v30.93,76.63 | v12.8,60.26 12.8,61.13 11.8,62.13 11.8,70.13 12.18,70.51 U$6.GND | v47.3,17.01 53.93,17.01 JP8.1
GND1  (via drill 0.61)
  Top 0.3: 89.68,31.01 91.55,31.01 R2.2 | 89.68,31.01 86.18,31.01 C4.1 | v95.43,28.63 97.43,28.63 IC2.11 | v89.68,30.88 89.68,31.01
  Bottom 0.3: v95.43,28.63 93.18,30.88 v89.68,30.88
GPA0  (via drill 0.61)
  Top 0.3: v32.43,32.88 39.43,32.88 41.3,31.01 41.3,30.26 38.18,27.13 38.18,22.63 37.3,21.76 35.18,21.76 IC4.21
  Bottom 0.3: v32.43,32.88 32.18,32.88 30.43,34.63 30.43,38.38 31.18,39.13 32.93,39.13 34.18,37.88 SV2.32
GPA1
  Top 0.3: IC4.22 35.05,23.13 33.3,23.13 30.43,26.01 30.43,38.38 31.18,39.13 35.43,39.13 36.68,37.88 SV2.30
GPA2  (via drill 0.61)
  Top 0.3: v32.43,25.51 33.55,24.38 35.05,24.38 IC4.23 | v21.3,33.51 19.8,35.01 19.8,36.51 23.3,40.01 37.18,40.01 39.3,37.88 SV2.28
  Bottom 0.3: v32.43,25.51 31.93,25.51 25.93,31.51 24.8,31.51 22.8,33.51 v21.3,33.51
GPA3  (via drill 0.61)
  Top 0.3: v36.93,22.88 36.93,24.63 35.93,25.63 35.18,25.63 IC4.24 | v22.43,23.51 20.43,23.51 17.43,26.51 17.43,28.63 18.3,29.51 18.68,29.51 19.43,30.26 19.43,34.38 19.05,34.76 19.05,37.76 19.93,38.63 19.93,40.63 23.18,43.88 v28.93,43.88
  Bottom 0.3: v36.93,22.88 28.3,22.88 28.05,22.63 23.3,22.63 v22.43,23.51 | v28.93,43.88 30.55,43.88 35.3,39.13 40.55,39.13 41.8,37.88 SV2.26
GPA4  (via drill 0.61)
  Top 0.3: v31.93,27.01 35.05,27.01 IC4.25 | v22.55,40.76 23.18,40.76 23.43,41.01 41.18,41.01 44.3,37.88 SV2.24
  Bottom 0.3: v31.93,27.01 31.43,27.01 26.18,32.26 25.05,32.26 22.55,34.76 v22.55,40.76
GPA5  (via drill 0.61)
  Top 0.3: v37.05,28.26 35.18,28.26 IC4.26 | v55.55,31.76 56.05,31.76 56.55,31.26 57.3,31.26 59.18,33.13 72.05,33.13 73.68,34.76 73.68,38.26 v69.18,42.76
  Bottom 0.3: v37.05,28.26 37.05,29.01 39.8,31.76 v55.55,31.76 | v69.18,42.76 67.43,42.76 67.05,42.38 57.18,42.38 56.68,41.88 51.68,41.88 47.68,37.88 47.05,37.88 SV2.22
GPA6  (via drill 0.61)
  Top 0.3: v39.05,29.51 35.18,29.51 IC4.27 | v55.8,29.51 56.55,29.51 58.8,31.76 71.93,31.76 72.3,31.38 72.3,28.88 72.05,28.63 72.05,27.88 72.8,27.13 73.55,27.13 77.93,31.51 77.93,34.13 v80.18,36.38 | v56.18,44.88 54.18,44.88 52.8,43.51 52.8,42.38 52.18,41.76 48.55,41.76 47.8,41.01 47.8,39.51 49.43,37.88 SV2.20
  Bottom 0.3: v55.8,29.51 v39.05,29.51 | v80.18,36.38 81.3,37.51 81.3,39.76 73.93,47.13 72.68,47.13 70.43,49.38 66.18,49.38 65.3,48.51 59.8,48.51 v56.18,44.88
GPA7  (via drill 0.61)
  Top 0.3: v40.18,30.63 35.18,30.63 IC4.28 | v59.93,20.38 v49.68,30.63 | v84.05,27.13 v87.18,24.01 | v80.05,39.51 v84.05,35.51 | v48.93,40.63 49.18,40.63 51.93,37.88 SV2.18
  Bottom 0.3: v49.68,30.63 v40.18,30.63 | v59.93,20.38 60.93,20.38 66.55,14.76 77.93,14.76 v87.18,24.01 | v84.05,35.51 v84.05,27.13 | v80.05,39.51 80.05,39.88 73.55,46.38 66.18,46.38 65.55,47.01 60.8,47.01 56.43,42.63 50.93,42.63 v48.93,40.63
INTSWITCH  (via drill 0.61)
  Top 0.3: v32.43,59.13 35.93,55.63 U$2.37 | v9.93,40.88 9.93,39.26 9.68,39.01 R18.2 9.55,38.88 9.55,35.76 S1.3 9.68,35.51 9.68,29.13 S1.4
  Bottom 0.3: v32.43,59.13 32.43,58.63 24.3,50.51 24.3,49.63 15.55,40.88 v9.93,40.88
IR1  (1 unrouted)
IR2  (1 unrouted)
IR3  (via drill 0.61)
  Top 0.3: v61.43,71.38 62.55,70.26 62.55,68.01 61.8,67.26 60.68,67.26 59.93,66.51 55.43,66.51 U$3.3 | v86.43,77.38 v86.43,71.38
  Bottom 0.3: v61.43,71.38 61.93,71.38 62.3,71.76 86.05,71.76 v86.43,71.38 | v86.43,77.38 84.55,77.38 81.05,80.88 80.8,80.88 U$1.42
IR4  (via drill 0.61)
  Top 0.3: v59.93,68.38 59.3,67.76 55.43,67.76 U$3.4 | v83.68,70.63 84.55,71.51 84.55,74.38 v81.55,77.38 | v79.55,78.38 80.05,78.38 82.55,80.88 83.18,80.88 U$1.43
  Bottom 0.3: v59.93,68.38 62.55,71.01 83.3,71.01 v83.68,70.63 | v81.55,77.38 80.55,77.38 v79.55,78.38
IR5  (via drill 0.61)
  Top 0.3: v61.43,68.38 60.3,69.51 59.55,69.51 59.05,69.01 55.43,69.01 U$3.5 | v86.05,69.51 87.93,71.38 v87.93,77.38
  Bottom 0.3: v61.43,68.38 73.43,68.38 73.8,68.76 76.93,68.76 77.68,69.51 v86.05,69.51 | v87.93,77.38 87.93,78.01 90.8,80.88 U$1.46
IR6  (via drill 0.61)
  Top 0.3: v58.55,70.13 55.43,70.13 U$3.6 | v65.18,60.38 v63.18,62.38 | v86.05,64.63 91.3,64.63 93.3,62.63 v93.3,62.13
  Bottom 0.3: v58.55,70.13 58.55,67.01 v63.18,62.38 | v65.18,60.38 65.68,60.38 69.18,63.88 85.3,63.88 v86.05,64.63 | v93.3,62.13 107.55,62.13 113.93,55.76 113.93,54.63 118.05,50.51 118.68,50.51 U$1.69
IR7  (1 unrouted)
IR8  (1 unrouted)
L1
  Top 0.3: U$1.51' 103.55,83.51 103.55,81.01 U$1.51
  Bottom 0.3: U$2.38 36.05,53.13 36.05,54.01 37.3,55.26 37.3,59.01 53.8,75.51 97.43,75.51 101.43,79.51 102.05,79.51 103.43,80.88 U$1.51
L2
  Bottom 0.3: U$2.36 38.55,53.13 38.55,54.01 39.93,55.38 39.93,60.63 54.05,74.76 97.68,74.76 101.68,78.76 103.93,78.76 106.05,80.88 U$1.52 106.05,81.13 106.05,83.51 U$1.52'
MB4  (1 unrouted)
MB5  (1 unrouted)
MB6  (via drill 0.61)  (2 unrouted)
  Top 0.3: 15.68,53.88 15.68,51.38 16.18,50.88 C11.1 | 15.68,53.88 15.68,55.63 C10.2 | v15.55,53.88 15.68,53.88
  Bottom 0.3: v15.55,53.88 13.93,55.51 7.05,55.51 U$1.6
MB7  (1 unrouted)
  Top 0.3: SV2.1 72.3,35.38 72.3,37.76 SV2.2
MB9  (1 unrouted)
  Top 0.3: SV2.5 67.3,35.38 67.3,37.76 SV2.6
MB10  (via drill 0.61)
  Top 0.3: v100.68,23.76 98.43,23.76 95.55,20.88 R3.2 93.93,20.88 v93.3,20.26 | v107.3,30.38 107.3,29.88 107.43,29.76 107.43,27.63 107.05,27.26 104.93,27.26 103.68,28.51 102.8,28.51 IC2.4 | v11.8,46.88 12.3,46.38 12.3,39.01 R18.1 12.43,38.88 12.8,38.51 12.8,27.76 13.05,27.51 13.05,24.51 v13.8,23.76 | v11.68,49.13 11.68,54.38 8.43,57.63 8.43,64.26 7.05,65.63 U$1.10 | v76.18,5.63 67.93,5.63 64.93,2.63 48.3,2.63 46.55,4.38 41.3,4.38 v39.3,6.38 | v17.68,19.88 v23.05,14.51
  Bottom 0.3: v107.3,30.38 v100.68,23.76 | v11.8,46.88 11.8,49.01 v11.68,49.13 | v93.3,20.26 90.8,20.26 v76.18,5.63 | v39.3,6.38 35.68,6.38 27.55,14.51 v23.05,14.51 | v13.8,23.76 v17.68,19.88
MB29  (via drill 0.61)
  Top 1: C13.2 58.8,10.38 57.3,10.38 54.68,13.01 54.05,13.01 JP9.1 | R1.1 79.43,31.63 79.18,31.38 79.18,28.26 C3.2 78.68,28.13 78.05,28.13 72.18,22.26 72.18,20.88 70.93,19.63 70.43,19.63 IC7.3 69.93,19.51 68.55,19.51 66.8,17.76 63.93,17.76 C14.2 63.68,17.26 v62.3,15.88 | SV2.39 24.05,35.38 24.05,37.76 SV2.40
  Bottom 1: v62.3,15.88 61.68,16.51 57.68,16.51 56.68,15.51 56.68,15.01 54.8,13.13 54.05,13.13 JP9.1 53.68,13.51 48.55,13.51 28.55,33.51 25.93,33.51 24.18,35.26 SV2.39 | U$1.29 47.55,80.88 47.55,72.01 25.55,50.01 25.55,39.26 24.18,37.88 SV2.40
MB33
  Top 0.3: IC3.6 73.43,63.13 73.43,63.76 66.8,70.38 66.05,70.38 57.93,78.51 57.93,80.88 U$1.33
MB34
  Top 0.3: IC3.7 74.68,63.13 74.68,63.76 67.3,71.13 66.3,71.13 60.43,77.01 60.43,80.88 U$1.34
MB40  (via drill 0.61)
  Top 0.3: v76.05,65.01 76.05,63.13 IC3.8 | v80.3,65.01 80.3,65.51 85.3,70.51 85.3,75.13 v83.05,77.38
  Bottom 0.3: v80.3,65.01 v76.05,65.01 | v83.05,77.38 80.93,79.51 77.05,79.51 75.68,80.88 U$1.40
MISO  (via drill 0.61)
  Top 0.3: U$5.12 60.8,48.13 60.8,49.01 56.8,53.01 56.3,53.01 U$2.22 | v53.3,67.38 51.8,68.88 50.18,68.88 U$3.12 | v60.43,62.51 60.43,62.13 59.8,61.51 59.8,58.26 v58.68,57.13 | v24.18,67.76 25.68,69.26 28.68,69.26 32.05,72.63 33.8,72.63 U$4.12 | 21.18,57.26 21.18,56.63 25.93,51.88 25.93,47.01 26.3,46.63 29.3,46.63 30.68,48.01 v34.3,48.01 | 21.18,57.26 v21.18,59.13 | v39.3,25.01 39.3,22.76 v36.93,20.38 | v13.93,53.88 13.93,54.26 14.3,54.63 14.3,56.88 14.68,57.26 21.18,57.26
  Bottom 0.3: v53.3,67.38 58.68,62.01 59.93,62.01 v60.43,62.51 | v58.68,57.13 57.43,55.88 57.43,54.26 56.3,53.13 U$2.22 56.43,53.13 56.43,51.13 54.05,48.76 48.3,48.76 47.93,49.13 35.43,49.13 v34.3,48.01 | v24.18,67.76 24.18,62.13 v21.18,59.13 | v39.3,25.01 38.8,25.01 29.18,34.63 29.18,35.26 SV2.35 | v36.93,20.38 33.93,20.38 29.18,15.63 20.43,15.63 6.8,29.26 6.8,40.63 8.8,42.63 8.8,48.76 v13.93,53.88
MOSI  (via drill 0.61)
  Top 0.3: U$5.11 62.05,48.13 62.05,49.76 58.8,53.01 U$2.20 | v44.8,72.38 46.93,70.26 50.05,70.26 U$3.11 | v36.43,72.38 34.93,73.88 33.93,73.88 U$4.11 33.8,73.88 32.3,73.88 29.8,71.38 v29.3,71.38 | v58.3,14.88 58.3,17.88 42.55,33.63 34.05,33.63 32.43,35.26 31.8,35.26 SV2.33 | v64.18,4.88 v60.68,8.38 | v121.55,36.01 122.8,37.26 122.8,81.51 118.68,85.63 114.68,85.63 114.55,85.76 14.55,85.76 v13.43,84.63 | v6.05,84.63 3.05,81.63 3.05,42.26 3.93,41.38 7.68,41.38 v9.93,43.63 | v14.8,49.13 17.05,49.13 v18.43,50.51 | v35.8,48.01 28.93,54.88 v28.93,56.63
  Bottom 0.3: v36.43,72.38 v44.8,72.38 | v58.3,14.88 58.3,10.76 v60.68,8.38 | v64.18,4.88 75.43,4.88 75.8,4.51 76.55,4.51 85.8,13.76 99.05,13.76 108.93,23.63 111.05,23.63 121.55,34.13 v121.55,36.01 | v6.05,84.63 v13.43,84.63 | v9.93,43.63 9.93,48.88 11.3,50.26 13.68,50.26 v14.8,49.13 | v18.43,50.51 18.43,53.76 25.11,60.45 | 25.11,60.45 29.3,64.63 v29.3,71.38 | v35.8,48.01 54.3,48.01 58.8,52.51 58.8,53.01 U$2.20 | 25.11,60.45 v28.93,56.63
N$1
  Top 0.3: 44.8,8.63 44.8,10.63 45.05,10.88 IC1.2 45.18,11.01 45.18,11.51 53.3,19.63 53.93,19.63 JP8.2 | 44.8,8.63 44.8,7.01 C1.1 | 44.8,8.63 34.8,8.63 32.55,10.88 32.3,10.88 C2.1
  Bottom 0.3: JP10.1 53.93,8.01 47.55,8.01 45.18,10.38 45.18,10.88 IC1.2
N$2
  Top 0.3: 92.18,18.76 92.18,20.76 90.55,22.38 90.55,23.51 R11.1 | 92.18,18.76 92.18,17.38 R6.2 | 92.18,18.76 96.18,18.76 97.05,17.88 97.8,17.88 R5.1
N$3
  Top 0.3: 100.18,27.26 102.68,27.26 IC2.3 | 100.18,27.26 97.55,27.26 IC2.12 97.43,27.38 92.3,27.38 91.68,28.01 R2.1 91.55,28.13 86.18,28.13 C4.2 86.05,28.26 82.05,28.26 C3.1 82.3,28.38 82.3,31.63 R1.2 | 100.18,29.88 102.68,29.88 IC2.5 | 100.18,29.88 97.55,29.88 IC2.10 | 100.18,29.88 100.18,27.26
N$4
  Top 0.3: R3.1 101.05,20.88 101.55,21.38 R4.2
N$5
  Top 0.3: R5.2 100.8,17.88 104.43,21.51 R4.1 104.43,21.63 104.43,26.01 | 104.43,26.01 102.8,26.01 IC2.2 | 104.43,26.01 106.8,26.01 108.8,28.01 108.8,28.63 R8.2
N$6
  Top 0.3: R9.2 96.55,37.26 96.55,36.01 101.43,31.13 102.68,31.13 IC2.6 102.8,31.01 103.8,31.01 104.43,30.38 104.43,30.26 105.93,28.76 R8.1
N$7
  Top 0.3: R7.2 94.3,12.63 94.3,16.63 94.93,17.26 R6.1
N$8
  Top 0.3: R9.1 93.68,37.26 93.68,34.38 94.05,34.01 R10.2 94.18,33.88 94.18,33.38 96.43,31.13 97.43,31.13 IC2.9
N$9  (via drill 0.61)
  Top 0.3: v93.3,29.26 93.3,31.88 91.3,33.88 R10.1 | R11.2 93.3,23.63 v93.3,25.38 93.43,25.38 93.93,25.88 97.43,25.88 IC2.13
  Bottom 0.3: v93.3,25.38 v93.3,29.26
N$10  (via drill 0.61)
  Top 0.3: v100.68,25.51 101.43,24.76 102.68,24.76 IC2.1 | D1.1 99.8,59.88 99.8,57.51 D1.2
  Bottom 0.3: v100.68,25.51 109.43,34.26 109.43,35.01 108.68,35.76 106.18,35.76 103.18,38.76 103.18,54.01 99.8,57.38 D1.2
N$11
  Top 0.3: C5.1 72.8,13.88 74.93,13.88 77.18,16.13 78.18,16.13 IC5.3
N$12  (via drill 0.61)
  Top 0.3: v96.68,34.38 97.43,33.63 97.43,32.38 IC2.8
  Bottom 0.3: v96.68,34.38 96.68,49.26 D1.4
N$13  (via drill 0.61)
  Top 0.3: v95.18,24.63 97.43,24.63 IC2.14 | v91.8,25.26 91.8,24.88 91.93,24.76 91.93,22.51 v92.8,21.63 | v110.55,28.13 110.55,30.88 101.68,39.76 101.68,47.88 99.8,49.76 D1.5
  Bottom 0.3: v95.18,24.63 94.05,24.63 93.68,24.26 92.8,24.26 v91.8,25.26 | v92.8,21.63 97.05,21.63 98.05,22.63 103.93,22.63 109.43,28.13 v110.55,28.13
N$14  (via drill 0.61)
  Top 0.3: v114.05,71.63 113.43,71.01 113.43,68.38 LED1.C
  Bottom 0.3: v114.05,71.63 115.68,73.26 R12.2
N$15  (via drill 0.61)
  Top 0.3: v112.3,63.88 112.3,64.63 113.3,65.63 LED2.C
  Bottom 0.3: v112.3,63.88 112.3,60.76 R13.2
N$16
  Top 0.3: R19.2 79.68,43.63 80.43,44.38 81.18,44.38 83.05,46.26 Q1.B
N$17  (via drill 0.61)
  Top 0.3: v22.68,44.88 28.43,44.88 29.43,45.88 29.55,45.88 30.93,47.26 32.18,47.26 34.05,45.38 Q2.B
  Bottom 0.3: v22.68,44.88 20.68,42.88 20.68,42.63 R20.2
N$18
  Top 0.3: C5.2 72.8,16.76 75.3,16.76 77.3,18.76 78.18,18.76 IC5.1
N$19
  Top 0.3: C6.2 72.43,11.13 73.55,11.13 77.3,14.88 78.18,14.88 IC5.4
N$22
  Top 0.3: C6.1 72.43,8.38 72.43,8.63 76.55,12.76 76.55,12.88 77.3,13.63 78.18,13.63 IC5.5
N$23
  Top 0.3: LED4.C 44.18,48.76 48.43,48.76 49.68,47.51 49.68,44.63 48.55,43.51 R15.1
N$24  (via drill 0.61)
  Top 0.3: v102.68,35.38 102.68,32.38 IC2.7
  Bottom 0.3: v102.68,35.38 102.68,38.26 102.43,38.51 102.43,53.01 100.68,54.76 99.8,54.76 D1.3
N$25
  Top 0.3: LED3.C 44.43,44.76 46.68,44.76 48.18,46.26 R14.1
N$26  (1 unrouted)
N$27  (1 unrouted)
N$28
  Top 0.3: C7.1 82.68,24.88 82.68,21.01 79.18,17.51 78.3,17.51 IC5.2
N$29
  Top 0.3: C8.2 85.05,21.01 85.05,18.26 79.3,12.51 78.3,12.51 IC5.6
N$30
  Bottom 0.3: R21.2 16.43,44.63 16.43,53.26 16.68,53.51 16.68,59.63 13.05,63.26 Q4.B
N$31  (via drill 0.61)
  Top 0.3: v33.3,15.88 33.3,15.63 30.93,13.26 22.8,13.26 16.55,19.51 16.55,21.63 R22.2 | v67.68,11.38 67.68,12.38 70.93,15.63 v70.93,16.63 | v90.3,39.13 v86.55,35.38
  Bottom 0.3: v33.3,15.88 33.8,15.88 41.8,7.88 43.3,7.88 46.05,5.13 61.43,5.13 v67.68,11.38 | v70.93,16.63 77.3,16.63 86.55,25.88 v86.55,35.38 | v90.3,39.13 90.3,43.76 91.05,44.51 Q3.B
N$32
  Top 0.3: R16.1 22.93,74.13 22.05,74.13 20.93,73.01 18.68,73.01 17.18,74.51 R17.2 17.05,74.63 14.43,74.63 C12.1 14.8,74.51 14.8,70.63 U$6.V+
N$38  (1 unrouted)
N$39
  Top 0.3: R25.2 28.18,59.63 26.43,61.38 21.93,61.38 20.05,63.26 Q7.B
N$40  (1 unrouted)
N$41
  Top 0.3: R23.2 99.18,64.63 97.43,66.38 93.93,66.38 92.05,68.26 Q5.B
NS50  (1 unrouted)
  Top 1: C1.2 47.55,7.01 47.55,10.88 IC1.1 47.93,10.51 53.93,10.51 JP10.2
PI1  (via drill 0.61)
  Top 0.3: U$5.15 57.05,48.13 55.8,48.13 U$5.16 55.8,48.26 55.8,49.38 52.55,52.63 52.55,54.38 | U$3.15 50.18,65.01 50.18,63.88 U$3.16 50.05,63.76 50.05,63.38 v49.18,62.51 | U$4.15 33.93,68.88 33.93,67.63 U$4.16 33.8,67.51 38.93,62.38 v46.93,62.38 | v52.55,57.01 52.55,54.38 | IC4.9 25.68,20.51 31.55,20.51 33.93,18.13 35.05,18.13 IC4.18 35.18,18.13 v49.93,18.13 | 77.86,66.7 79.68,68.51 79.68,72.51 IC3.18 | 77.86,66.7 77.3,66.13 77.3,63.13 IC3.9 | 82.3,53.13 81.68,53.13 U$2.2 | v85.05,55.88 82.3,53.13 | v95.93,61.01 95.93,62.51 v92.3,66.13 | 77.86,66.7 v78.43,66.13 | v87.18,47.13 87.18,45.51 85.3,43.63 80.8,43.63 79.3,42.13 77.3,42.13 76.93,41.76 v74.68,41.76 75.05,41.88 75.05,44.76 74.68,45.13 71.68,45.13 v65.3,51.51 | v83.55,51.01 83.18,51.38 83.05,51.38 82.3,52.13 82.3,53.13 | 52.55,54.38 54.18,54.38 55.05,55.26 55.05,56.01 56.18,57.13 v57.18,57.13
  Bottom 0.3: v46.93,62.38 47.05,62.51 v49.18,62.51 52.43,62.51 54.8,60.13 54.8,59.26 v52.55,57.01 | v85.05,55.88 85.05,57.76 88.3,61.01 v95.93,61.01 | v78.43,66.13 v92.3,66.13 | v49.93,18.13 54.8,23.01 65.43,23.01 67.3,24.88 67.3,25.88 66.05,27.13 66.05,29.38 67.55,30.88 73.8,30.88 76.68,33.76 76.68,39.26 74.68,41.26 v74.68,41.76 | v87.18,47.13 87.18,47.38 v83.55,51.01 | v57.18,57.13 58.3,58.26 60.3,58.26 62.68,55.88 62.68,55.13 63.55,54.26 64.3,54.26 65.3,53.26 v65.3,51.51
PI2  (via drill 0.61)
  Top 0.3: C2.2 35.18,11.01 42.55,11.01 IC1.3 | v77.18,25.01 79.8,25.01 C7.2 | v73.18,28.26 73.18,29.88 73.55,30.26 C9.2 73.68,30.38 73.68,33.76 78.93,39.01 78.93,39.88 81.93,42.88 v88.43,42.88 | v67.43,13.63 67.43,14.63 v69.43,16.63 | v14.93,79.76 15.18,79.51 25.93,79.51 28.43,77.01 28.43,76.26 26.43,74.26 25.8,74.26 R16.2 | v105.93,65.26 v115.93,75.26
  Bottom 0.3: 76.43,25.01 v77.18,25.01 | v73.18,28.26 76.43,25.01 | v67.43,13.63 60.43,6.63 46.55,6.63 42.68,10.51 42.68,10.88 IC1.3 | v69.43,16.63 69.43,17.88 76.43,24.88 76.43,25.01 | v14.93,79.76 14.93,84.26 16.43,85.76 114.55,85.76 115.93,84.38 v115.93,75.26 | v105.93,65.26 93.93,65.26 92.8,64.13 90.18,64.13 81.68,55.63 U$2.1 81.8,55.63 89.8,47.63 89.8,44.26 v88.43,42.88
PI3  (via drill 0.61)
  Top 0.3: v29.43,14.51 28.55,15.38 25.68,15.38 IC4.13 | v109.3,25.51 v109.3,22.51 | v104.3,50.13 100.8,53.63 93.93,53.63 90.05,57.51 88.3,57.51 | 88.3,57.51 87.05,57.51 82.43,62.13 82.43,63.01 IC3.13 | v83.43,52.51 88.3,57.38 88.3,57.51 | v53.68,59.63 56.18,59.63 v57.68,61.13 | v63.8,58.26 v60.93,61.13
  Bottom 0.3: v29.43,14.51 29.68,14.51 36.68,7.51 40.18,7.51 44.05,3.63 45.18,3.63 45.55,3.26 50.68,3.26 51.3,2.63 75.68,2.63 86.05,13.01 99.8,13.01 v109.3,22.51 | v109.3,25.51 110.93,25.51 112.43,27.01 112.43,34.38 108.43,38.38 106.18,38.38 104.3,40.26 v104.3,50.13 | 81.55,51.88 82.8,51.88 v83.43,52.51 | 81.55,51.88 80.93,51.88 79.8,53.01 79.18,53.01 U$2.4 | v53.68,59.63 50.05,56.01 50.05,55.38 49.05,54.38 48.43,54.38 47.43,53.38 47.43,52.76 46.55,51.88 35.43,51.88 27.8,44.26 27.8,43.51 29.05,42.26 29.05,37.88 SV2.36 | v60.93,61.13 v57.68,61.13 | v63.8,58.26 63.8,57.26 65.3,55.76 65.3,55.13 66.18,54.26 66.8,54.26 67.8,53.26 67.8,52.63 70.3,50.13 78.93,50.13 80.05,49.01 80.8,49.01 81.55,49.76 81.55,51.88
PI4  (via drill 0.61)
  Top 0.3: v66.8,6.01 64.18,3.38 63.43,3.38 61.68,5.13 44.05,5.13 41.68,7.51 33.18,7.51 30.8,9.88 30.8,12.01 32.93,14.13 35.05,14.13 IC4.15 | v108.3,34.63 108.3,35.63 109.3,36.63 109.3,40.13 108.55,40.88 106.18,40.88 102.43,44.63 102.43,49.51 100.93,51.01 97.05,51.01 v95.93,52.13 | v83.3,55.63 82.18,56.76 80.3,56.76 79.18,55.63 U$2.3
  Bottom 0.3: v66.8,6.01 75.05,6.01 91.8,22.76 96.43,22.76 v108.3,34.63 | v95.93,52.13 90.43,52.13 90.3,52.01 86.93,52.01 v83.3,55.63
PI5  (via drill 0.61)
  Top 0.3: U$2.6 76.68,53.13 77.8,54.26 77.8,55.88 81.05,59.13 IC3.12 81.05,63.76 81.8,64.51 84.55,64.51 v93.18,55.88 | v32.8,20.76 32.8,22.13 28.68,26.26 28.18,26.26 27.05,27.38 27.05,31.26 24.43,33.88 23.43,33.88 22.68,34.63 22.68,38.38 23.55,39.26 25.18,39.26 26.55,37.88 SV2.38 | IC4.12 25.68,16.76 v28.8,16.76 28.93,16.76 v30.93,14.76
  Bottom 0.3: v32.8,20.76 v28.8,16.76 | v93.18,55.88 96.3,55.88 98.55,53.63 100.8,53.63 101.68,52.76 101.68,35.88 100.68,34.88 100.68,28.63 95.55,23.51 89.18,23.51 72.8,7.13 64.43,7.13 61.68,4.38 44.3,4.38 33.93,14.76 v30.93,14.76
PI8  (via drill 0.61)
  Top 0.3: v75.43,51.38 80.43,46.38 Q1.C | v9.8,73.88 9.8,76.63 10.8,77.63 10.8,81.38 6.43,85.76 5.68,85.76 2.3,82.38 2.3,42.01 4.05,40.26 v7.93,40.26 | v21.05,40.26 21.05,40.76 23.05,42.76 29.3,42.76 31.43,44.88 31.43,45.26 Q2.C | U$2.7 74.05,56.01 v71.3,58.76 | v65.8,58.76 63.8,56.76 60.43,56.76 v60.18,56.51
  Bottom 0.3: U$2.7 74.05,54.63 75.43,53.26 v75.43,51.38 | Q3.C 88.43,45.26 86.93,45.26 86.05,44.38 82.43,44.38 80.55,46.26 Q1.C | v9.8,73.88 10.43,73.26 10.43,63.38 Q4.C | v7.93,40.26 9.05,40.26 9.55,39.76 16.05,39.76 16.68,40.38 20.93,40.38 v21.05,40.26 | v65.8,58.76 v71.3,58.76 | v60.18,56.51 60.18,52.76 50.8,43.38 33.43,43.38 31.55,45.26 Q2.C
PI10  (via drill 0.61)
  Top 0.3: Q5.E 94.68,68.38 99.68,68.38 102.55,71.26 Q6.E 102.55,71.51 102.55,71.88 103.93,73.26 109.68,73.26 | v19.8,76.38 17.55,78.63 14.55,78.63 13.8,79.38 13.8,82.13 16.68,85.01 114.3,85.01 115.18,84.13 115.18,80.38 111.43,76.63 110.93,76.63 109.68,75.38 109.68,73.26 | 109.68,73.26 109.68,71.38 Q8.E
  Bottom 0.3: U$2.9 71.55,55.63 71.8,55.63 75.55,59.38 76.18,59.38 79.18,62.38 87.43,62.38 90.05,65.01 92.68,65.01 94.55,66.88 94.55,68.26 Q5.E | v19.8,76.38 22.55,73.63 22.55,63.38 Q7.E
PI22  (via drill 0.61)
  Top 0.3: R17.1 19.93,74.63 v18.3,76.26 15.93,76.26 11.55,80.63 11.55,85.26 12.3,86.01 v12.3,86.51 | v69.43,57.63 67.8,56.01 67.8,55.38 66.8,54.38 66.18,54.38 64.93,53.13 63.93,53.13 U$2.16 | v87.05,63.51 90.93,63.51 v91.43,63.01
  Bottom 0.3: v18.3,76.26 18.3,72.13 19.8,70.63 U$6.OUT | v69.43,57.63 72.8,57.63 75.3,60.13 75.93,60.13 78.93,63.13 86.68,63.13 v87.05,63.51 | v91.43,63.01 92.68,63.01 93.05,63.38 108.3,63.38 117.05,72.13 117.05,84.26 114.8,86.51 v12.3,86.51
PWML
  Top 0.3: U$1.50' 101.05,83.51 101.05,81.01 U$1.50
  Bottom 0.3: U$2.39 33.43,55.63 33.43,56.13 53.55,76.26 96.3,76.26 100.93,80.88 U$1.50
PWMR
  Top 0.3: U$1.54' 111.18,83.51 111.18,81.01 U$1.54
  Bottom 0.3: U$2.32 43.68,53.13 43.68,54.01 44.93,55.26 44.93,63.63 54.55,73.26 98.18,73.26 101.93,77.01 107.18,77.01 111.05,80.88 U$1.54
R1
  Top 0.3: U$1.53' 108.68,83.51 108.68,81.01 U$1.53
  Bottom 0.3: U$2.34 41.05,53.13 41.05,54.01 42.43,55.38 42.43,62.13 54.3,74.01 97.93,74.01 101.68,77.76 105.43,77.76 108.55,80.88 U$1.53
R2
  Bottom 0.3: U$2.30 46.18,53.13 46.18,54.01 47.3,55.13 47.3,56.13 45.8,57.63 45.8,63.51 54.8,72.51 93.93,72.51 97.05,69.38 97.93,69.38 98.8,70.26 98.8,72.88 102.18,76.26 107.68,76.26 110.93,79.51 112.3,79.51 113.68,80.88 U$1.55 113.68,81.13 113.68,83.51 U$1.55'
RS  (via drill 0.61)
  Top 0.3: v73.93,66.01 69.68,70.26 69.68,72.51 IC3.26 | v48.68,49.88 47.68,49.88 44.68,52.88 44.68,53.51 43.8,54.38 38.05,54.38 37.18,55.26 37.18,57.13 v27.68,66.63 | v27.55,73.38 27.55,74.38 29.8,76.63 29.8,80.88 U$1.22
  Bottom 0.3: v73.93,66.01 69.3,66.01 62.3,59.01 57.55,59.01 54.93,56.38 54.93,52.63 54.05,51.76 50.55,51.76 v48.68,49.88 | v27.68,66.63 27.68,73.26 v27.55,73.38
RX_FT_EN  (via drill 0.61)
  Top 0.3: v22.68,25.76 24.05,24.38 IC4.6 | v11.3,35.76 11.3,37.51 11.05,37.76 v11.05,44.63 | v18.43,47.76 v14.18,47.76 | v23.8,47.63 v21.8,49.63
  Bottom 0.3: v22.68,25.76 22.68,26.63 20.55,28.76 20.55,29.88 18.3,32.13 14.93,32.13 v11.3,35.76 | v14.18,47.76 v11.05,44.63 | v18.43,47.76 19.93,47.76 v21.8,49.63 | v23.8,47.63 23.8,42.88 23.55,42.63 R20.1
RX_P_EN  (via drill 0.61)
  Top 0.3: v31.68,21.76 27.8,25.63 25.68,25.63 IC4.5 | v88.8,32.13 87.55,32.13 86.18,33.51 84.55,33.51 v80.18,37.88 | v77.55,40.88 75.3,40.88 75.05,40.63 74.3,40.63 73.55,41.38 73.55,43.63 R19.1
  Bottom 0.3: v31.68,21.76 32.3,21.76 32.43,21.88 36.43,21.88 36.8,21.51 37.3,21.51 41.18,17.63 41.18,9.51 42.05,8.63 43.55,8.63 46.3,5.88 60.68,5.88 67.3,12.51 77.18,12.51 88.55,23.88 88.55,31.88 v88.8,32.13 | v80.18,37.88 77.55,40.51 v77.55,40.88
RX_RS_EN  (via drill 0.61)
  Top 0.3: v22.55,21.88 25.55,21.88 IC4.8 | v18.8,21.88 17.55,23.13 15.18,23.13 13.68,21.63 R22.1
  Bottom 0.3: v18.8,21.88 v22.55,21.88
RX_XB_EN  (via drill 0.61)
  Top 0.3: v27.43,24.51 27.43,24.26 26.3,23.13 25.68,23.13 IC4.7 | v22.43,32.38 22.43,33.88 v20.93,35.38 | v17.05,39.26 17.05,41.26 v15.55,42.76
  Bottom 0.3: v27.43,24.51 27.43,27.38 v22.43,32.38 | v17.05,39.26 v20.93,35.38 | v15.55,42.76 13.68,44.63 R21.1
RXFT  (1 unrouted)
RXP  (via drill 0.61)
  Top 0.3: v70.05,48.26 v73.18,48.26 | v54.55,40.76 v54.55,43.76
  Bottom 0.3: v73.18,48.26 83.68,48.26 85.55,46.38 Q1.E | v70.05,48.26 66.05,48.26 65.55,47.76 60.55,47.76 56.55,43.76 v54.55,43.76 | v54.55,40.76 60.68,40.76 62.3,39.13 63.43,39.13 64.68,37.88 SV2.8
RXRS  (via drill 0.61)
  Top 0.3: v90.05,14.88 90.05,15.13 89.05,16.13 88.05,16.13 IC5.14 | v110.55,26.63 115.93,32.01 115.93,35.01 118.68,37.76 U$1.74 | v99.55,34.51 100.3,34.51 102.3,36.51 103.43,36.51 v109.3,30.63
  Bottom 0.3: v90.05,14.88 91.3,14.88 98.18,21.76 104.05,21.76 108.93,26.63 v110.55,26.63 110.68,26.63 111.68,27.63 111.68,28.51 109.55,30.63 v109.3,30.63 | v99.55,34.51 98.3,33.26 96.3,33.26 93.68,35.88 93.68,45.26 Q3.E
RXXB
  Top 0.3: Q4.E 15.55,63.38 15.55,64.76 7.05,73.26 U$1.13
SERVO  (via drill 0.61)
  Top 0.3: U$7.1 59.18,30.26 61.55,30.26 U$7.1' 61.68,30.26 64.05,30.26 U$7.1" 64.3,30.13 67.55,30.13 68.93,28.76 v68.93,25.76 | C16.2 65.55,9.13 65.55,12.63 65.05,13.13 C15.2 65.05,13.38 67.93,16.26 v67.93,16.63 | v67.93,21.76 69.93,21.76 IC7.2
  Bottom 0.3: v67.93,16.63 v67.93,21.76 67.93,21.88 68.93,22.88 v68.93,25.76
SERVO1  (via drill 0.61)
  Top 0.3: v78.93,45.51 76.93,45.51 76.18,46.26 76.18,46.76 73.55,49.38 71.05,49.38 67.8,52.63 67.8,53.51 68.93,54.63 68.93,55.51 U$2.11 | v59.93,21.88 59.93,22.38 57.68,24.63 57.68,26.26 59.05,27.63 U$7.2
  Bottom 0.3: v78.93,45.51 78.93,45.13 87.68,36.38 87.68,26.01 77.18,15.51 66.8,15.51 60.43,21.88 v59.93,21.88
SERVO2  (1 unrouted)
SERVO3  (via drill 0.61)
  Top 0.3: v65.3,50.01 65.8,50.01 v71.8,44.01 | v67.18,29.01 65.43,29.01 64.18,27.76 U$7.2"
  Bottom 0.3: v65.3,50.01 62.68,52.63 62.68,53.38 61.43,54.63 61.43,55.51 U$2.17 | v71.8,44.01 73.93,44.01 76.43,41.51 76.43,40.51 77.43,39.51 77.43,33.51 74.05,30.13 68.3,30.13 v67.18,29.01
SH1  (via drill 0.61)
  Top 0.3: v35.8,67.01 36.3,67.51 38.93,67.51 U$4.1 | v30.43,67.01 28.8,67.01 28.05,67.76 26.68,67.76 24.18,65.26 19.55,65.26 18.8,64.51 18.8,62.26 17.93,61.38 10.05,61.38 9.18,62.26 9.18,66.13 7.05,68.26 U$1.11
  Bottom 0.3: v30.43,67.01 v35.8,67.01
SH2  (via drill 0.61)
  Top 0.3: v35.8,69.51 36.3,69.01 38.93,69.01 U$4.2
  Bottom 0.3: v35.8,69.51 32.93,69.51 24.05,78.38 7.05,78.38 U$1.15
SH3  (1 unrouted)
SH4  (1 unrouted)
SH5  (1 unrouted)
SPICLK  (via drill 0.61)
  Top 0.3: 55.3,51.88 54.93,51.88 53.8,53.01 U$2.24 | 55.3,51.88 56.68,51.88 59.55,49.01 59.55,48.13 U$5.13 | v44.3,71.01 47.55,67.76 50.05,67.76 U$3.13 | v35.93,71.01 35.18,71.01 34.8,71.38 33.93,71.38 U$4.13 | v28.55,27.38 28.55,30.76 26.68,32.63 26.68,35.26 SV2.37 | v21.68,29.13 19.43,29.13 v18.68,28.38 | v16.93,30.13 16.93,37.63 18.18,38.88 18.18,45.51 17.55,46.13 v17.55,46.51 | v28.8,62.51 v25.68,62.51 | v55.3,51.51 55.3,51.88 | v51.93,50.63 49.8,52.76 49.8,56.63 48.05,58.38 48.05,62.76 v42.05,68.76
  Bottom 0.3: v35.93,71.01 36.93,71.01 | 36.93,71.01 42.05,71.01 | 42.05,71.01 v44.3,71.01 | v28.55,27.38 28.55,24.13 27.8,23.38 27.05,23.38 24.93,25.51 24.93,28.38 24.18,29.13 v21.68,29.13 | v16.93,30.13 v18.68,28.38 | v17.55,46.51 17.55,47.13 17.3,47.38 17.3,53.13 17.68,53.51 17.68,54.13 25.68,62.13 v25.68,62.51 | v28.8,62.51 32.8,62.51 36.93,66.63 36.93,71.01 | v55.3,51.51 54.8,51.51 53.93,50.63 v51.93,50.63 | 42.05,71.01 v42.05,68.76
TX_FT_EN  (via drill 0.61)
  Top 0.3: v22.3,30.88 23.68,29.51 25.55,29.51 IC4.2
  Bottom 0.3: v22.3,30.88 19.55,33.63 R24.1
TX_P_EN  (1 unrouted)
TX_RS_EN  (via drill 0.61)
  Top 0.3: v18.55,26.88 25.55,26.88 IC4.4 | v11.68,27.51 11.68,25.63 R26.1
  Bottom 0.3: v18.55,26.88 12.3,26.88 v11.68,27.51
TX_XB_EN  (via drill 0.61)
  Top 0.3: v23.8,28.01 23.93,28.13 25.55,28.13 IC4.3 | v18.3,30.63 18.3,38.01 19.18,38.88 v19.18,46.01 | v25.55,57.76 25.55,59.63 R25.1
  Bottom 0.3: v23.8,28.01 23.8,25.38 23.05,24.63 22.3,24.63 19.8,27.13 19.8,29.13 v18.3,30.63 | v19.18,46.01 19.68,46.01 23.55,49.88 23.55,55.76 v25.55,57.76
TXFT  (1 unrouted)
TXP  (via drill 0.61)
  Top 0.3: v94.8,54.76 94.8,62.13 89.55,67.38 89.55,68.26 Q5.C | v92.3,47.01 92.3,44.13 86.8,38.63 v83.93,38.63 | v66.18,25.26 v67.8,26.88 | v56.93,32.38 57.43,32.38 58.93,33.88 63.3,33.88 64.68,35.26 SV2.7
  Bottom 0.3: v94.8,54.76 97.05,52.51 97.05,51.76 v92.3,47.01 | v83.93,38.63 74.68,29.38 70.3,29.38 v67.8,26.88 | v66.18,25.26 64.68,23.76 58.55,23.76 56.93,25.38 v56.93,32.38
TXRS  (via drill 0.61)
  Top 0.3: v117.3,34.88 117.3,29.01 104.55,16.26 101.18,16.26 93.8,8.88 86.8,8.88 86.43,9.26 86.43,14.26 87.05,14.88 87.93,14.88 IC5.13 | v109.3,50.76 109.3,60.38 102.55,67.13 102.55,68.51 104.43,70.38 104.43,71.26 Q8.C
  Bottom 0.3: v117.3,34.88 117.3,38.88 118.68,40.26 U$1.73 118.68,40.38 109.3,49.76 v109.3,50.76
TXXB
  Bottom 0.3: Q7.C 17.43,63.38 17.43,65.38 13.43,69.38 13.43,71.76 9.3,75.88 7.05,75.88 U$1.14
WL1  (via drill 0.61)
  Top 0.3: v41.05,74.01 39.05,74.01 U$4.6 | v45.18,78.01 49.55,78.01 50.3,78.76 50.3,80.88 U$1.30
  Bottom 0.3: v41.05,74.01 39.93,75.13 39.93,75.88 41.8,77.76 44.93,77.76 v45.18,78.01
WL2  (via drill 0.61)
  Top 0.3: v41.05,75.51 40.8,75.26 39.05,75.26 U$4.7 | v45.18,75.76 46.93,75.76 47.3,76.13 50.68,76.13 52.68,78.13 52.68,80.88 U$1.31
  Bottom 0.3: v41.05,75.51 41.43,75.88 41.43,76.01 42.18,76.76 44.18,76.76 v45.18,75.76
WL3  (via drill 0.61)
  Top 0.3: v42.55,75.63 41.55,76.63 39.05,76.63 U$4.8 | v44.3,73.88 44.8,73.88 45.93,75.01 47.18,75.01 47.55,75.38 50.93,75.38 55.18,79.63 55.18,80.88 U$1.32
  Bottom 0.3: v44.3,73.88 v42.55,75.63
WL4
  Top 0.3: SV1.1 65.18,78.26 65.18,80.63 65.43,80.88 U$1.36
WL5
  Top 0.3: SV1.2 67.8,78.26 67.8,80.76 67.93,80.88 U$1.37
WL6
  Top 0.3: SV1.3 70.3,78.26 70.3,80.76 70.43,80.88 U$1.38
WL7
  Top 0.3: SV1.4 72.8,78.26 72.8,80.63 73.05,80.88 U$1.39